# Altium PCB PCB_RGB2HDMI_2022-10-02_beta3.pcbdoc (part 3 of 4)
Units mil, origin at the board's own origin, x right, y up, seen from the top; angles counter-clockwise.
Board outline 5558.95 x 3224.07 mil, 2 copper layers (Top Layer, Bottom Layer); 47 components, 54 nets, 201 pads, 161 vias.
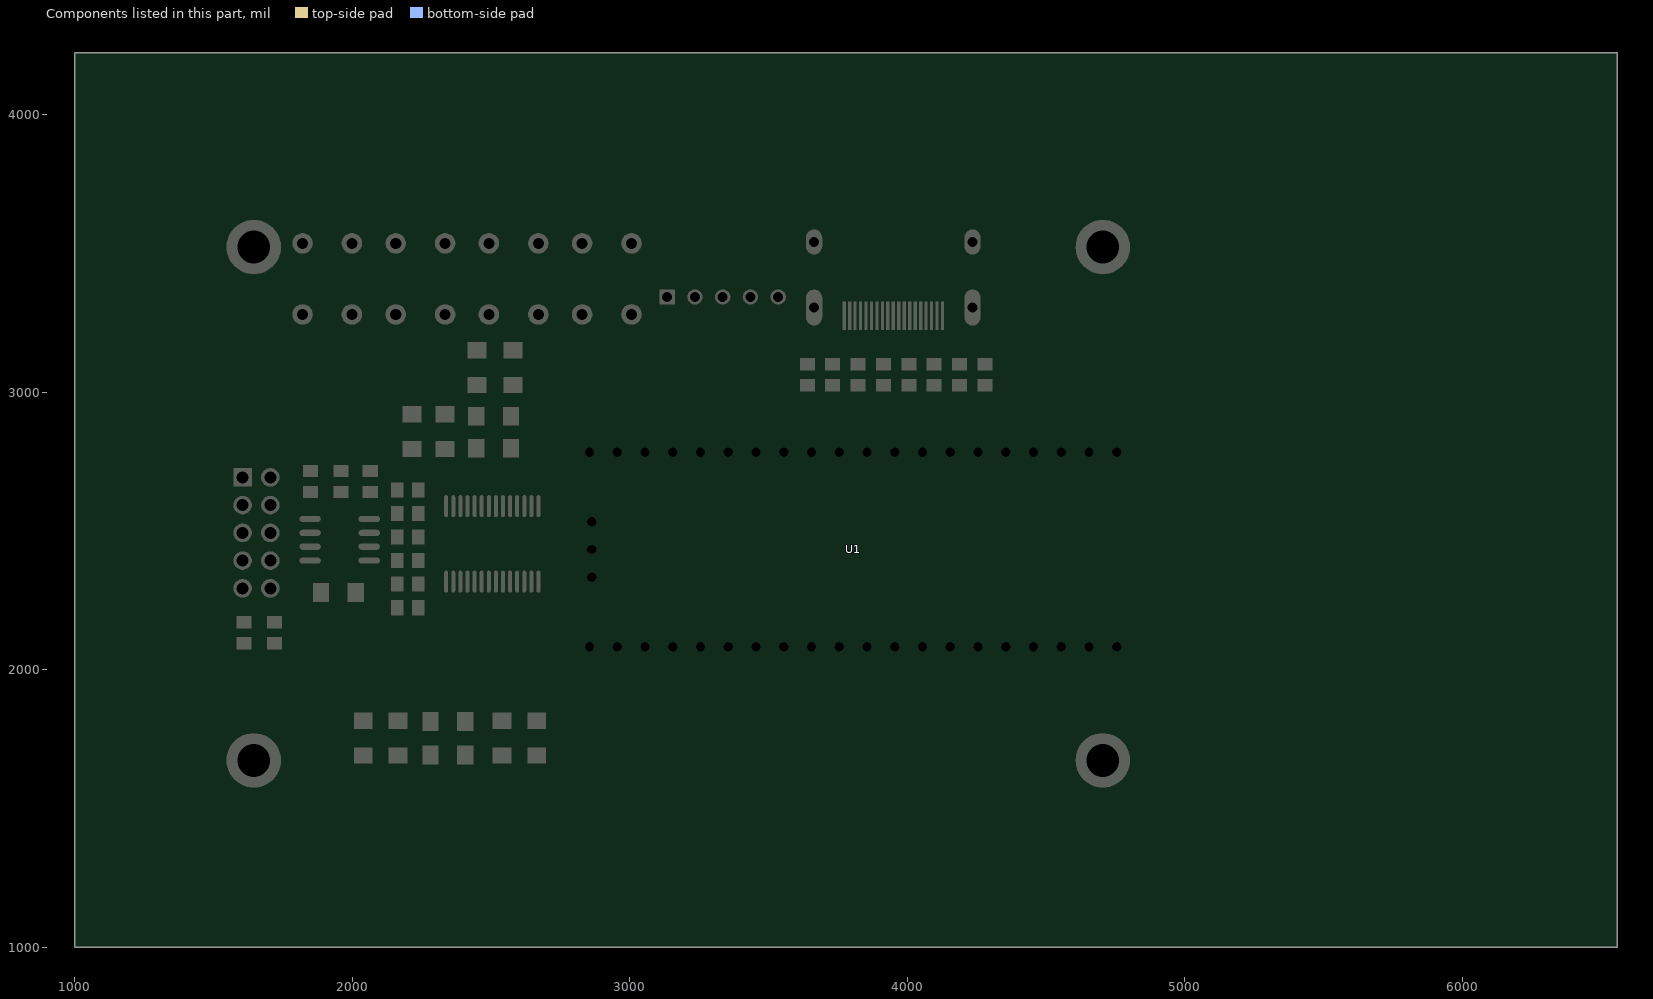
[diagram p3: the components of this part, seen from the top]

## Footprints (in the part's own frame and the unit in brackets; to place one, negate y for a bottom-side part, rotate by r counter-clockwise, add the part's x,y. Pads: shape width x height; smd on the part's side, far side on the other; paste and mask are expansions set on the pad) (continued)
RASPBERRY-PI-PICO [mm] (continued)
  Top Layer region: 11.366,2.032 11.404,2.031 11.442,2.028 11.48,2.023 11.517,2.017 11.555,2.008 11.591,1.998 11.627,1.986 11.662,1.972 11.697,1.957 11.731,1.939 11.764,1.92 11.796,1.9 11.827,1.877 11.856,1.854 11.885,1.829 11.912,1.802 11.938,1.774 11.962,1.745 11.985,1.715 12.007,1.683 12.026,1.651 12.045,1.618 12.061,1.583 12.076,1.548 12.089,1.513 12.1,1.476 12.109,1.44 12.117,1.402 12.123,1.365 12.126,1.327 12.128,1.289 12.128,1.251 12.126,1.213 12.123,1.175 12.117,1.138 12.109,1.1 12.1,1.064 12.089,1.027 12.076,0.992 12.061,0.957 12.045,0.922 12.026,0.889 12.007,0.857 11.985,0.825 11.962,0.795 11.938,0.766 11.912,0.738 11.885,0.711 11.856,0.686 11.827,0.663 11.796,0.64 11.764,0.62 11.731,0.601 11.697,0.583 11.662,0.568 11.627,0.554 11.591,0.542 11.555,0.532 11.517,0.523 11.48,0.517 11.442,0.512 11.404,0.509 11.366,0.508 8.954,0.508 8.916,0.509 8.878,0.512 8.84,0.517 8.803,0.523 8.765,0.532 8.729,0.542 8.693,0.554 8.658,0.568 8.623,0.583 8.589,0.601 8.556,0.62 8.524,0.64 8.493,0.663 8.464,0.686 8.435,0.711 8.408,0.738 8.382,0.766 8.358,0.795 8.335,0.825 8.313,0.857 8.294,0.889 8.275,0.922 8.259,0.957 8.244,0.992 8.231,1.027 8.22,1.064 8.211,1.1 8.203,1.138 8.197,1.175 8.194,1.213 8.192,1.251 8.192,1.289 8.194,1.327 8.197,1.365 8.203,1.402 8.211,1.44 8.22,1.476 8.231,1.513 8.244,1.548 8.259,1.583 8.275,1.618 8.294,1.651 8.313,1.683 8.335,1.715 8.358,1.745 8.382,1.774 8.408,1.802 8.435,1.829 8.464,1.854 8.493,1.877 8.524,1.9 8.556,1.92 8.589,1.939 8.623,1.957 8.658,1.972 8.693,1.986 8.729,1.998 8.765,2.008 8.803,2.017 8.84,2.023 8.878,2.028 8.916,2.031 8.954,2.032
  Top Layer region: 11.366,4.572 11.404,4.571 11.442,4.568 11.48,4.563 11.517,4.557 11.555,4.548 11.591,4.538 11.627,4.526 11.662,4.512 11.697,4.497 11.731,4.479 11.764,4.46 11.796,4.44 11.827,4.417 11.856,4.394 11.885,4.369 11.912,4.342 11.938,4.314 11.962,4.285 11.985,4.255 12.007,4.223 12.026,4.191 12.045,4.158 12.061,4.123 12.076,4.088 12.089,4.053 12.1,4.016 12.109,3.98 12.117,3.942 12.123,3.905 12.126,3.867 12.128,3.829 12.128,3.791 12.126,3.753 12.123,3.715 12.117,3.678 12.109,3.64 12.1,3.604 12.089,3.567 12.076,3.532 12.061,3.497 12.045,3.462 12.026,3.429 12.007,3.397 11.985,3.365 11.962,3.335 11.938,3.306 11.912,3.278 11.885,3.251 11.856,3.226 11.827,3.203 11.796,3.18 11.764,3.16 11.731,3.141 11.697,3.123 11.662,3.108 11.627,3.094 11.591,3.082 11.555,3.072 11.517,3.063 11.48,3.057 11.442,3.052 11.404,3.049 11.366,3.048 8.954,3.048 8.916,3.049 8.878,3.052 8.84,3.057 8.803,3.063 8.765,3.072 8.729,3.082 8.693,3.094 8.658,3.108 8.623,3.123 8.589,3.141 8.556,3.16 8.524,3.18 8.493,3.203 8.464,3.226 8.435,3.251 8.408,3.278 8.382,3.306 8.358,3.335 8.335,3.365 8.313,3.397 8.294,3.429 8.275,3.462 8.259,3.497 8.244,3.532 8.231,3.567 8.22,3.604 8.211,3.64 8.203,3.678 8.197,3.715 8.194,3.753 8.192,3.791 8.192,3.829 8.194,3.867 8.197,3.905 8.203,3.942 8.211,3.98 8.22,4.016 8.231,4.053 8.244,4.088 8.259,4.123 8.275,4.158 8.294,4.191 8.313,4.223 8.335,4.255 8.358,4.285 8.382,4.314 8.408,4.342 8.435,4.369 8.464,4.394 8.493,4.417 8.524,4.44 8.556,4.46 8.589,4.479 8.623,4.497 8.658,4.512 8.693,4.526 8.729,4.538 8.765,4.548 8.803,4.557 8.84,4.563 8.878,4.568 8.916,4.571 8.953,4.572
  Top Layer region: 11.366,9.652 11.404,9.651 11.442,9.648 11.48,9.643 11.517,9.637 11.555,9.628 11.591,9.618 11.627,9.606 11.662,9.592 11.697,9.577 11.731,9.559 11.764,9.54 11.796,9.52 11.827,9.497 11.856,9.474 11.885,9.449 11.912,9.422 11.938,9.394 11.962,9.365 11.985,9.335 12.007,9.303 12.026,9.271 12.045,9.238 12.061,9.203 12.076,9.168 12.089,9.133 12.1,9.096 12.109,9.06 12.117,9.022 12.123,8.985 12.126,8.947 12.128,8.909 12.128,8.871 12.126,8.833 12.123,8.795 12.117,8.758 12.109,8.72 12.1,8.684 12.089,8.647 12.076,8.612 12.061,8.577 12.045,8.542 12.026,8.509 12.007,8.477 11.985,8.445 11.962,8.415 11.938,8.386 11.912,8.358 11.885,8.331 11.856,8.306 11.827,8.283 11.796,8.26 11.764,8.24 11.731,8.221 11.697,8.203 11.662,8.188 11.627,8.174 11.591,8.162 11.555,8.152 11.517,8.143 11.48,8.137 11.442,8.132 11.404,8.129 11.366,8.128 8.953,8.128 8.916,8.129 8.878,8.132 8.84,8.137 8.803,8.143 8.765,8.152 8.729,8.162 8.693,8.174 8.658,8.188 8.623,8.203 8.589,8.221 8.556,8.24 8.524,8.26 8.493,8.283 8.464,8.306 8.435,8.331 8.408,8.358 8.382,8.386 8.358,8.415 8.335,8.445 8.313,8.477 8.294,8.509 8.275,8.542 8.259,8.577 8.244,8.612 8.231,8.647 8.22,8.684 8.211,8.72 8.203,8.758 8.197,8.795 8.194,8.833 8.192,8.871 8.192,8.909 8.194,8.947 8.197,8.985 8.203,9.022 8.211,9.06 8.22,9.096 8.231,9.133 8.244,9.168 8.259,9.203 8.275,9.238 8.294,9.271 8.313,9.303 8.335,9.335 8.358,9.365 8.382,9.394 8.408,9.422 8.435,9.449 8.464,9.474 8.493,9.497 8.524,9.52 8.556,9.54 8.589,9.559 8.623,9.577 8.658,9.592 8.693,9.606 8.729,9.618 8.765,9.628 8.803,9.637 8.84,9.643 8.878,9.648 8.916,9.651 8.953,9.652
  Top Layer region: 11.366,12.192 11.404,12.191 11.442,12.188 11.48,12.183 11.517,12.177 11.555,12.168 11.591,12.158 11.627,12.146 11.662,12.132 11.697,12.117 11.731,12.099 11.764,12.08 11.796,12.06 11.827,12.037 11.856,12.014 11.885,11.989 11.912,11.962 11.938,11.934 11.962,11.905 11.985,11.875 12.007,11.843 12.026,11.811 12.045,11.778 12.061,11.743 12.076,11.708 12.089,11.673 12.1,11.636 12.109,11.6 12.117,11.562 12.123,11.525 12.126,11.487 12.128,11.449 12.128,11.411 12.126,11.373 12.123,11.335 12.117,11.298 12.109,11.26 12.1,11.224 12.089,11.187 12.076,11.152 12.061,11.117 12.045,11.082 12.026,11.049 12.007,11.017 11.985,10.985 11.962,10.955 11.938,10.926 11.912,10.898 11.885,10.871 11.856,10.846 11.827,10.823 11.796,10.8 11.764,10.78 11.731,10.761 11.697,10.743 11.662,10.728 11.627,10.714 11.591,10.702 11.555,10.692 11.517,10.683 11.48,10.677 11.442,10.672 11.404,10.669 11.366,10.668 8.953,10.668 8.916,10.669 8.878,10.672 8.84,10.677 8.803,10.683 8.765,10.692 8.729,10.702 8.693,10.714 8.658,10.728 8.623,10.743 8.589,10.761 8.556,10.78 8.524,10.8 8.493,10.823 8.464,10.846 8.435,10.871 8.408,10.898 8.382,10.926 8.358,10.955 8.335,10.985 8.313,11.017 8.294,11.049 8.275,11.082 8.259,11.117 8.244,11.152 8.231,11.187 8.22,11.224 8.211,11.26 8.203,11.298 8.197,11.335 8.194,11.373 8.192,11.411 8.192,11.449 8.194,11.487 8.197,11.525 8.203,11.562 8.211,11.6 8.22,11.636 8.231,11.673 8.244,11.708 8.259,11.743 8.275,11.778 8.294,11.811 8.313,11.843 8.335,11.875 8.358,11.905 8.382,11.934 8.408,11.962 8.435,11.989 8.464,12.014 8.493,12.037 8.524,12.06 8.556,12.08 8.589,12.099 8.623,12.117 8.658,12.132 8.693,12.146 8.729,12.158 8.765,12.168 8.803,12.177 8.84,12.183 8.878,12.188 8.916,12.191 8.953,12.192
  Top Layer region: 11.366,14.732 11.404,14.731 11.442,14.728 11.48,14.723 11.517,14.717 11.555,14.708 11.591,14.698 11.627,14.686 11.662,14.672 11.697,14.657 11.731,14.639 11.764,14.62 11.796,14.6 11.827,14.577 11.856,14.554 11.885,14.529 11.912,14.502 11.938,14.474 11.962,14.445 11.985,14.415 12.007,14.383 12.026,14.351 12.045,14.318 12.061,14.283 12.076,14.248 12.089,14.213 12.1,14.176 12.109,14.14 12.117,14.102 12.123,14.065 12.126,14.027 12.128,13.989 12.128,13.951 12.126,13.913 12.123,13.875 12.117,13.838 12.109,13.8 12.1,13.764 12.089,13.727 12.076,13.692 12.061,13.657 12.045,13.622 12.026,13.589 12.007,13.557 11.985,13.525 11.962,13.495 11.938,13.466 11.912,13.438 11.885,13.411 11.856,13.386 11.827,13.363 11.796,13.34 11.764,13.32 11.731,13.301 11.697,13.283 11.662,13.268 11.627,13.254 11.591,13.242 11.555,13.232 11.517,13.223 11.48,13.217 11.442,13.212 11.404,13.209 11.366,13.208 8.953,13.208 8.916,13.209 8.878,13.212 8.84,13.217 8.803,13.223 8.765,13.232 8.729,13.242 8.693,13.254 8.658,13.268 8.623,13.283 8.589,13.301 8.556,13.32 8.524,13.34 8.493,13.363 8.464,13.386 8.435,13.411 8.408,13.438 8.382,13.466 8.358,13.495 8.335,13.525 8.313,13.557 8.294,13.589 8.275,13.622 8.259,13.657 8.244,13.692 8.231,13.727 8.22,13.764 8.211,13.8 8.203,13.838 8.197,13.875 8.194,13.913 8.192,13.951 8.192,13.989 8.194,14.027 8.197,14.065 8.203,14.102 8.211,14.14 8.22,14.176 8.231,14.213 8.244,14.248 8.259,14.283 8.275,14.318 8.294,14.351 8.313,14.383 8.335,14.415 8.358,14.445 8.382,14.474 8.408,14.502 8.435,14.529 8.464,14.554 8.493,14.577 8.524,14.6 8.556,14.62 8.589,14.639 8.623,14.657 8.658,14.672 8.693,14.686 8.729,14.698 8.765,14.708 8.803,14.717 8.84,14.723 8.878,14.728 8.916,14.731 8.953,14.732
  Top Layer region: 11.366,17.272 11.404,17.271 11.442,17.268 11.48,17.263 11.517,17.257 11.555,17.248 11.591,17.238 11.627,17.226 11.662,17.212 11.697,17.197 11.731,17.179 11.764,17.16 11.796,17.14 11.827,17.117 11.856,17.094 11.885,17.069 11.912,17.042 11.938,17.014 11.962,16.985 11.985,16.955 12.007,16.923 12.026,16.891 12.045,16.858 12.061,16.823 12.076,16.788 12.089,16.753 12.1,16.716 12.109,16.68 12.117,16.642 12.123,16.605 12.126,16.567 12.128,16.529 12.128,16.491 12.126,16.453 12.123,16.415 12.117,16.378 12.109,16.34 12.1,16.304 12.089,16.267 12.076,16.232 12.061,16.197 12.045,16.162 12.026,16.129 12.007,16.097 11.985,16.065 11.962,16.035 11.938,16.006 11.912,15.978 11.885,15.951 11.856,15.926 11.827,15.903 11.796,15.88 11.764,15.86 11.731,15.841 11.697,15.823 11.662,15.808 11.627,15.794 11.591,15.782 11.555,15.772 11.517,15.763 11.48,15.757 11.442,15.752 11.404,15.749 11.366,15.748 8.953,15.748 8.916,15.749 8.878,15.752 8.84,15.757 8.803,15.763 8.765,15.772 8.729,15.782 8.693,15.794 8.658,15.808 8.623,15.823 8.589,15.841 8.556,15.86 8.524,15.88 8.493,15.903 8.464,15.926 8.435,15.951 8.408,15.978 8.382,16.006 8.358,16.035 8.335,16.065 8.313,16.097 8.294,16.129 8.275,16.162 8.259,16.197 8.244,16.232 8.231,16.267 8.22,16.304 8.211,16.34 8.203,16.378 8.197,16.415 8.194,16.453 8.192,16.491 8.192,16.529 8.194,16.567 8.197,16.605 8.203,16.642 8.211,16.68 8.22,16.716 8.231,16.753 8.244,16.788 8.259,16.823 8.275,16.858 8.294,16.891 8.313,16.923 8.335,16.955 8.358,16.985 8.382,17.014 8.408,17.042 8.435,17.069 8.464,17.094 8.493,17.117 8.524,17.14 8.556,17.16 8.589,17.179 8.623,17.197 8.658,17.212 8.693,17.226 8.729,17.238 8.765,17.248 8.803,17.257 8.84,17.263 8.878,17.268 8.916,17.271 8.953,17.272
  Top Layer region: 11.366,22.352 11.404,22.351 11.442,22.348 11.48,22.343 11.517,22.337 11.555,22.328 11.591,22.318 11.627,22.306 11.662,22.292 11.697,22.277 11.731,22.259 11.764,22.24 11.796,22.22 11.827,22.197 11.856,22.174 11.885,22.149 11.912,22.122 11.938,22.094 11.962,22.065 11.985,22.035 12.007,22.003 12.026,21.971 12.045,21.938 12.061,21.903 12.076,21.868 12.089,21.833 12.1,21.796 12.109,21.76 12.117,21.722 12.123,21.685 12.126,21.647 12.128,21.609 12.128,21.571 12.126,21.533 12.123,21.495 12.117,21.458 12.109,21.42 12.1,21.384 12.089,21.347 12.076,21.312 12.061,21.277 12.045,21.242 12.026,21.209 12.007,21.177 11.985,21.145 11.962,21.115 11.938,21.086 11.912,21.058 11.885,21.031 11.856,21.006 11.827,20.983 11.796,20.96 11.764,20.94 11.731,20.921 11.697,20.903 11.662,20.888 11.627,20.874 11.591,20.862 11.555,20.852 11.517,20.843 11.48,20.837 11.442,20.832 11.404,20.829 11.366,20.828 8.953,20.828 8.916,20.829 8.878,20.832 8.84,20.837 8.803,20.843 8.765,20.852 8.729,20.862 8.693,20.874 8.658,20.888 8.623,20.903 8.589,20.921 8.556,20.94 8.524,20.96 8.493,20.983 8.464,21.006 8.435,21.031 8.408,21.058 8.382,21.086 8.358,21.115 8.335,21.145 8.313,21.177 8.294,21.209 8.275,21.242 8.259,21.277 8.244,21.312 8.231,21.347 8.22,21.384 8.211,21.42 8.203,21.458 8.197,21.495 8.194,21.533 8.192,21.571 8.192,21.609 8.194,21.647 8.197,21.685 8.203,21.722 8.211,21.76 8.22,21.796 8.231,21.833 8.244,21.868 8.259,21.903 8.275,21.938 8.294,21.971 8.313,22.003 8.335,22.035 8.358,22.065 8.382,22.094 8.408,22.122 8.435,22.149 8.464,22.174 8.493,22.197 8.524,22.22 8.556,22.24 8.589,22.259 8.623,22.277 8.658,22.292 8.693,22.306 8.729,22.318 8.765,22.328 8.803,22.337 8.84,22.343 8.878,22.348 8.916,22.351 8.953,22.352
  Top Layer region: 11.366,24.892 11.404,24.891 11.442,24.888 11.48,24.883 11.517,24.877 11.555,24.868 11.591,24.858 11.627,24.846 11.662,24.832 11.697,24.817 11.731,24.799 11.764,24.78 11.796,24.76 11.827,24.737 11.856,24.714 11.885,24.689 11.912,24.662 11.938,24.634 11.962,24.605 11.985,24.575 12.007,24.543 12.026,24.511 12.045,24.478 12.061,24.443 12.076,24.408 12.089,24.373 12.1,24.336 12.109,24.3 12.117,24.262 12.123,24.225 12.126,24.187 12.128,24.149 12.128,24.111 12.126,24.073 12.123,24.035 12.117,23.998 12.109,23.96 12.1,23.924 12.089,23.887 12.076,23.852 12.061,23.817 12.045,23.782 12.026,23.749 12.007,23.717 11.985,23.685 11.962,23.655 11.938,23.626 11.912,23.598 11.885,23.571 11.856,23.546 11.827,23.523 11.796,23.5 11.764,23.48 11.731,23.461 11.697,23.443 11.662,23.428 11.627,23.414 11.591,23.402 11.555,23.392 11.517,23.383 11.48,23.377 11.442,23.372 11.404,23.369 11.366,23.368 8.953,23.368 8.916,23.369 8.878,23.372 8.84,23.377 8.803,23.383 8.765,23.392 8.729,23.402 8.693,23.414 8.658,23.428 8.623,23.443 8.589,23.461 8.556,23.48 8.524,23.5 8.493,23.523 8.464,23.546 8.435,23.571 8.408,23.598 8.382,23.626 8.358,23.655 8.335,23.685 8.313,23.717 8.294,23.749 8.275,23.782 8.259,23.817 8.244,23.852 8.231,23.887 8.22,23.924 8.211,23.96 8.203,23.998 8.197,24.035 8.194,24.073 8.192,24.111 8.192,24.149 8.194,24.187 8.197,24.225 8.203,24.262 8.211,24.3 8.22,24.336 8.231,24.373 8.244,24.408 8.259,24.443 8.275,24.478 8.294,24.511 8.313,24.543 8.335,24.575 8.358,24.605 8.382,24.634 8.408,24.662 8.435,24.689 8.464,24.714 8.493,24.737 8.524,24.76 8.556,24.78 8.589,24.799 8.623,24.817 8.658,24.832 8.693,24.846 8.729,24.858 8.765,24.868 8.803,24.877 8.84,24.883 8.878,24.888 8.916,24.891 8.953,24.892
  Top Layer region: -11.366,-24.892 -11.404,-24.891 -11.442,-24.888 -11.48,-24.883 -11.517,-24.877 -11.555,-24.868 -11.591,-24.858 -11.627,-24.846 -11.662,-24.832 -11.697,-24.817 -11.731,-24.799 -11.764,-24.78 -11.796,-24.76 -11.827,-24.737 -11.856,-24.714 -11.885,-24.689 -11.912,-24.662 -11.938,-24.634 -11.962,-24.605 -11.985,-24.575 -12.007,-24.543 -12.026,-24.511 -12.045,-24.478 -12.061,-24.443 -12.076,-24.408 -12.089,-24.373 -12.1,-24.336 -12.109,-24.3 -12.117,-24.262 -12.123,-24.225 -12.126,-24.187 -12.128,-24.149 -12.128,-24.111 -12.126,-24.073 -12.123,-24.035 -12.117,-23.998 -12.109,-23.96 -12.1,-23.924 -12.089,-23.887 -12.076,-23.852 -12.061,-23.817 -12.045,-23.782 -12.026,-23.749 -12.007,-23.717 -11.985,-23.685 -11.962,-23.655 -11.938,-23.626 -11.912,-23.598 -11.885,-23.571 -11.856,-23.546 -11.827,-23.523 -11.796,-23.5 -11.764,-23.48 -11.731,-23.461 -11.697,-23.443 -11.662,-23.428 -11.627,-23.414 -11.591,-23.402 -11.555,-23.392 -11.517,-23.383 -11.48,-23.377 -11.442,-23.372 -11.404,-23.369 -11.366,-23.368 -8.953,-23.368 -8.916,-23.369 -8.878,-23.372 -8.84,-23.377 -8.803,-23.383 -8.765,-23.392 -8.729,-23.402 -8.693,-23.414 -8.658,-23.428 -8.623,-23.443 -8.589,-23.461 -8.556,-23.48 -8.524,-23.5 -8.493,-23.523 -8.464,-23.546 -8.435,-23.571 -8.408,-23.598 -8.382,-23.626 -8.358,-23.655 -8.335,-23.685 -8.313,-23.717 -8.294,-23.749 -8.275,-23.782 -8.259,-23.817 -8.244,-23.852 -8.231,-23.887 -8.22,-23.924 -8.211,-23.96 -8.203,-23.998 -8.197,-24.035 -8.194,-24.073 -8.192,-24.111 -8.192,-24.149 -8.194,-24.187 -8.197,-24.225 -8.203,-24.262 -8.211,-24.3 -8.22,-24.336 -8.231,-24.373 -8.244,-24.408 -8.259,-24.443 -8.275,-24.478 -8.294,-24.511 -8.313,-24.543 -8.335,-24.575 -8.358,-24.605 -8.382,-24.634 -8.408,-24.662 -8.435,-24.689 -8.464,-24.714 -8.493,-24.737 -8.524,-24.76 -8.556,-24.78 -8.589,-24.799 -8.623,-24.817 -8.658,-24.832 -8.693,-24.846 -8.729,-24.858 -8.765,-24.868 -8.803,-24.877 -8.84,-24.883 -8.878,-24.888 -8.916,-24.891 -8.953,-24.892
  Top Layer region: -12.128,7.112 -8.192,7.112 -8.192,5.588 -12.128,5.588
  Top Layer region: -12.128,-5.588 -8.192,-5.588 -8.192,-7.112 -12.128,-7.112
  Top Layer region: -12.128,-18.288 -8.192,-18.288 -8.192,-19.812 -12.128,-19.812
  Top Layer region: 12.128,-19.812 8.192,-19.812 8.192,-18.288 12.128,-18.288
  Top Layer region: 12.128,-7.112 8.192,-7.112 8.192,-5.588 12.128,-5.588
  Top Layer region: 12.128,5.588 8.192,5.588 8.192,7.112 12.128,7.112
  Top Layer region: 12.128,18.288 8.192,18.288 8.192,19.812 12.128,19.812
  Top Layer region: -0.762,-27.165 -0.762,-23.229 0.762,-23.229 0.762,-27.165
  Bottom Layer region: -11.367,23.368 -11.404,23.369 -11.442,23.372 -11.48,23.377 -11.517,23.383 -11.555,23.392 -11.591,23.402 -11.627,23.414 -11.662,23.428 -11.697,23.443 -11.731,23.461 -11.764,23.48 -11.796,23.5 -11.827,23.523 -11.856,23.546 -11.885,23.571 -11.912,23.598 -11.938,23.626 -11.962,23.655 -11.985,23.685 -12.007,23.717 -12.026,23.749 -12.045,23.782 -12.061,23.817 -12.076,23.852 -12.089,23.887 -12.1,23.924 -12.109,23.96 -12.117,23.998 -12.123,24.035 -12.126,24.073 -12.128,24.111 -12.128,24.149 -12.126,24.187 -12.123,24.225 -12.117,24.262 -12.109,24.3 -12.1,24.336 -12.089,24.373 -12.076,24.408 -12.061,24.443 -12.045,24.478 -12.026,24.511 -12.007,24.543 -11.985,24.575 -11.962,24.605 -11.938,24.634 -11.912,24.662 -11.885,24.689 -11.856,24.714 -11.827,24.737 -11.796,24.76 -11.764,24.78 -11.731,24.799 -11.697,24.817 -11.662,24.832 -11.627,24.846 -11.591,24.858 -11.555,24.868 -11.517,24.877 -11.48,24.883 -11.442,24.888 -11.404,24.891 -11.367,24.892 -8.954,24.892 -8.916,24.891 -8.878,24.888 -8.84,24.883 -8.803,24.877 -8.765,24.868 -8.729,24.858 -8.693,24.846 -8.658,24.832 -8.623,24.817 -8.589,24.799 -8.556,24.78 -8.524,24.76 -8.493,24.737 -8.464,24.714 -8.435,24.689 -8.408,24.662 -8.382,24.634 -8.358,24.605 -8.335,24.575 -8.313,24.543 -8.294,24.511 -8.275,24.478 -8.259,24.443 -8.244,24.408 -8.231,24.373 -8.22,24.336 -8.211,24.3 -8.203,24.262 -8.197,24.225 -8.194,24.187 -8.192,24.149 -8.192,24.111 -8.194,24.073 -8.197,24.035 -8.203,23.998 -8.211,23.96 -8.22,23.924 -8.231,23.887 -8.244,23.852 -8.259,23.817 -8.275,23.782 -8.294,23.749 -8.313,23.717 -8.335,23.685 -8.358,23.655 -8.382,23.626 -8.408,23.598 -8.435,23.571 -8.464,23.546 -8.493,23.523 -8.524,23.5 -8.556,23.48 -8.589,23.461 -8.623,23.443 -8.658,23.428 -8.693,23.414 -8.729,23.402 -8.765,23.392 -8.803,23.383 -8.84,23.377 -8.878,23.372 -8.916,23.369 -8.954,23.368
  Bottom Layer region: -11.367,20.828 -11.404,20.829 -11.442,20.832 -11.48,20.837 -11.517,20.843 -11.555,20.852 -11.591,20.862 -11.627,20.874 -11.662,20.888 -11.697,20.903 -11.731,20.921 -11.764,20.94 -11.796,20.96 -11.827,20.983 -11.856,21.006 -11.885,21.031 -11.912,21.058 -11.938,21.086 -11.962,21.115 -11.985,21.145 -12.007,21.177 -12.026,21.209 -12.045,21.242 -12.061,21.277 -12.076,21.312 -12.089,21.347 -12.1,21.384 -12.109,21.42 -12.117,21.458 -12.123,21.495 -12.126,21.533 -12.128,21.571 -12.128,21.609 -12.126,21.647 -12.123,21.685 -12.117,21.722 -12.109,21.76 -12.1,21.796 -12.089,21.833 -12.076,21.868 -12.061,21.903 -12.045,21.938 -12.026,21.971 -12.007,22.003 -11.985,22.035 -11.962,22.065 -11.938,22.094 -11.912,22.122 -11.885,22.149 -11.856,22.174 -11.827,22.197 -11.796,22.22 -11.764,22.24 -11.731,22.259 -11.697,22.277 -11.662,22.292 -11.627,22.306 -11.591,22.318 -11.555,22.328 -11.517,22.337 -11.48,22.343 -11.442,22.348 -11.404,22.351 -11.367,22.352 -8.954,22.352 -8.916,22.351 -8.878,22.348 -8.84,22.343 -8.803,22.337 -8.765,22.328 -8.729,22.318 -8.693,22.306 -8.658,22.292 -8.623,22.277 -8.589,22.259 -8.556,22.24 -8.524,22.22 -8.493,22.197 -8.464,22.174 -8.435,22.149 -8.408,22.122 -8.382,22.094 -8.358,22.065 -8.335,22.035 -8.313,22.003 -8.294,21.971 -8.275,21.938 -8.259,21.903 -8.244,21.868 -8.231,21.833 -8.22,21.796 -8.211,21.76 -8.203,21.722 -8.197,21.685 -8.194,21.647 -8.192,21.609 -8.192,21.571 -8.194,21.533 -8.197,21.495 -8.203,21.458 -8.211,21.42 -8.22,21.384 -8.231,21.347 -8.244,21.312 -8.259,21.277 -8.275,21.242 -8.294,21.209 -8.313,21.177 -8.335,21.145 -8.358,21.115 -8.382,21.086 -8.408,21.058 -8.435,21.031 -8.464,21.006 -8.493,20.983 -8.524,20.96 -8.556,20.94 -8.589,20.921 -8.623,20.903 -8.658,20.888 -8.693,20.874 -8.729,20.862 -8.765,20.852 -8.803,20.843 -8.84,20.837 -8.878,20.832 -8.916,20.829 -8.954,20.828
  Bottom Layer region: -12.128,19.812 -8.192,19.812 -8.192,18.288 -12.128,18.288
  Bottom Layer region: -11.367,15.748 -11.404,15.749 -11.442,15.752 -11.48,15.757 -11.517,15.763 -11.555,15.772 -11.591,15.782 -11.627,15.794 -11.662,15.808 -11.697,15.823 -11.731,15.841 -11.764,15.86 -11.796,15.88 -11.827,15.903 -11.856,15.926 -11.885,15.951 -11.912,15.978 -11.938,16.006 -11.962,16.035 -11.985,16.065 -12.007,16.097 -12.026,16.129 -12.045,16.162 -12.061,16.197 -12.076,16.232 -12.089,16.267 -12.1,16.304 -12.109,16.34 -12.117,16.378 -12.123,16.415 -12.126,16.453 -12.128,16.491 -12.128,16.529 -12.126,16.567 -12.123,16.605 -12.117,16.642 -12.109,16.68 -12.1,16.716 -12.089,16.753 -12.076,16.788 -12.061,16.823 -12.045,16.858 -12.026,16.891 -12.007,16.923 -11.985,16.955 -11.962,16.985 -11.938,17.014 -11.912,17.042 -11.885,17.069 -11.856,17.094 -11.827,17.117 -11.796,17.14 -11.764,17.16 -11.731,17.179 -11.697,17.197 -11.662,17.212 -11.627,17.226 -11.591,17.238 -11.555,17.248 -11.517,17.257 -11.48,17.263 -11.442,17.268 -11.404,17.271 -11.367,17.272 -8.954,17.272 -8.916,17.271 -8.878,17.268 -8.84,17.263 -8.803,17.257 -8.765,17.248 -8.729,17.238 -8.693,17.226 -8.658,17.212 -8.623,17.197 -8.589,17.179 -8.556,17.16 -8.524,17.14 -8.493,17.117 -8.464,17.094 -8.435,17.069 -8.408,17.042 -8.382,17.014 -8.358,16.985 -8.335,16.955 -8.313,16.923 -8.294,16.891 -8.275,16.858 -8.259,16.823 -8.244,16.788 -8.231,16.753 -8.22,16.716 -8.211,16.68 -8.203,16.642 -8.197,16.605 -8.194,16.567 -8.192,16.529 -8.192,16.491 -8.194,16.453 -8.197,16.415 -8.203,16.378 -8.211,16.34 -8.22,16.304 -8.231,16.267 -8.244,16.232 -8.259,16.197 -8.275,16.162 -8.294,16.129 -8.313,16.097 -8.335,16.065 -8.358,16.035 -8.382,16.006 -8.408,15.978 -8.435,15.951 -8.464,15.926 -8.493,15.903 -8.524,15.88 -8.556,15.86 -8.589,15.841 -8.623,15.823 -8.658,15.808 -8.693,15.794 -8.729,15.782 -8.765,15.772 -8.803,15.763 -8.84,15.757 -8.878,15.752 -8.916,15.749 -8.954,15.748
  Bottom Layer region: -11.367,13.208 -11.404,13.209 -11.442,13.212 -11.48,13.217 -11.517,13.223 -11.555,13.232 -11.591,13.242 -11.627,13.254 -11.662,13.268 -11.697,13.283 -11.731,13.301 -11.764,13.32 -11.796,13.34 -11.827,13.363 -11.856,13.386 -11.885,13.411 -11.912,13.438 -11.938,13.466 -11.962,13.495 -11.985,13.525 -12.007,13.557 -12.026,13.589 -12.045,13.622 -12.061,13.657 -12.076,13.692 -12.089,13.727 -12.1,13.764 -12.109,13.8 -12.117,13.838 -12.123,13.875 -12.126,13.913 -12.128,13.951 -12.128,13.989 -12.126,14.027 -12.123,14.065 -12.117,14.102 -12.109,14.14 -12.1,14.176 -12.089,14.213 -12.076,14.248 -12.061,14.283 -12.045,14.318 -12.026,14.351 -12.007,14.383 -11.985,14.415 -11.962,14.445 -11.938,14.474 -11.912,14.502 -11.885,14.529 -11.856,14.554 -11.827,14.577 -11.796,14.6 -11.764,14.62 -11.731,14.639 -11.697,14.657 -11.662,14.672 -11.627,14.686 -11.591,14.698 -11.555,14.708 -11.517,14.717 -11.48,14.723 -11.442,14.728 -11.404,14.731 -11.367,14.732 -8.954,14.732 -8.916,14.731 -8.878,14.728 -8.84,14.723 -8.803,14.717 -8.765,14.708 -8.729,14.698 -8.693,14.686 -8.658,14.672 -8.623,14.657 -8.589,14.639 -8.556,14.62 -8.524,14.6 -8.493,14.577 -8.464,14.554 -8.435,14.529 -8.408,14.502 -8.382,14.474 -8.358,14.445 -8.335,14.415 -8.313,14.383 -8.294,14.351 -8.275,14.318 -8.259,14.283 -8.244,14.248 -8.231,14.213 -8.22,14.176 -8.211,14.14 -8.203,14.102 -8.197,14.065 -8.194,14.027 -8.192,13.989 -8.192,13.951 -8.194,13.913 -8.197,13.875 -8.203,13.838 -8.211,13.8 -8.22,13.764 -8.231,13.727 -8.244,13.692 -8.259,13.657 -8.275,13.622 -8.294,13.589 -8.313,13.557 -8.335,13.525 -8.358,13.495 -8.382,13.466 -8.408,13.438 -8.435,13.411 -8.464,13.386 -8.493,13.363 -8.524,13.34 -8.556,13.32 -8.589,13.301 -8.623,13.283 -8.658,13.268 -8.693,13.254 -8.729,13.242 -8.765,13.232 -8.803,13.223 -8.84,13.217 -8.878,13.212 -8.916,13.209 -8.954,13.208
  Bottom Layer region: -11.367,10.668 -11.404,10.669 -11.442,10.672 -11.48,10.677 -11.517,10.683 -11.555,10.692 -11.591,10.702 -11.627,10.714 -11.662,10.728 -11.697,10.743 -11.731,10.761 -11.764,10.78 -11.796,10.8 -11.827,10.823 -11.856,10.846 -11.885,10.871 -11.912,10.898 -11.938,10.926 -11.962,10.955 -11.985,10.985 -12.007,11.017 -12.026,11.049 -12.045,11.082 -12.061,11.117 -12.076,11.152 -12.089,11.187 -12.1,11.224 -12.109,11.26 -12.117,11.298 -12.123,11.335 -12.126,11.373 -12.128,11.411 -12.128,11.449 -12.126,11.487 -12.123,11.525 -12.117,11.562 -12.109,11.6 -12.1,11.636 -12.089,11.673 -12.076,11.708 -12.061,11.743 -12.045,11.778 -12.026,11.811 -12.007,11.843 -11.985,11.875 -11.962,11.905 -11.938,11.934 -11.912,11.962 -11.885,11.989 -11.856,12.014 -11.827,12.037 -11.796,12.06 -11.764,12.08 -11.731,12.099 -11.697,12.117 -11.662,12.132 -11.627,12.146 -11.591,12.158 -11.555,12.168 -11.517,12.177 -11.48,12.183 -11.442,12.188 -11.404,12.191 -11.367,12.192 -8.954,12.192 -8.916,12.191 -8.878,12.188 -8.84,12.183 -8.803,12.177 -8.765,12.168 -8.729,12.158 -8.693,12.146 -8.658,12.132 -8.623,12.117 -8.589,12.099 -8.556,12.08 -8.524,12.06 -8.493,12.037 -8.464,12.014 -8.435,11.989 -8.408,11.962 -8.382,11.934 -8.358,11.905 -8.335,11.875 -8.313,11.843 -8.294,11.811 -8.275,11.778 -8.259,11.743 -8.244,11.708 -8.231,11.673 -8.22,11.636 -8.211,11.6 -8.203,11.562 -8.197,11.525 -8.194,11.487 -8.192,11.449 -8.192,11.411 -8.194,11.373 -8.197,11.335 -8.203,11.298 -8.211,11.26 -8.22,11.224 -8.231,11.187 -8.244,11.152 -8.259,11.117 -8.275,11.082 -8.294,11.049 -8.313,11.017 -8.335,10.985 -8.358,10.955 -8.382,10.926 -8.408,10.898 -8.435,10.871 -8.464,10.846 -8.493,10.823 -8.524,10.8 -8.556,10.78 -8.589,10.761 -8.623,10.743 -8.658,10.728 -8.693,10.714 -8.729,10.702 -8.765,10.692 -8.803,10.683 -8.84,10.677 -8.878,10.672 -8.916,10.669 -8.954,10.668
  Bottom Layer region: -11.367,8.128 -11.404,8.129 -11.442,8.132 -11.48,8.137 -11.517,8.143 -11.555,8.152 -11.591,8.162 -11.627,8.174 -11.662,8.188 -11.697,8.203 -11.731,8.221 -11.764,8.24 -11.796,8.26 -11.827,8.283 -11.856,8.306 -11.885,8.331 -11.912,8.358 -11.938,8.386 -11.962,8.415 -11.985,8.445 -12.007,8.477 -12.026,8.509 -12.045,8.542 -12.061,8.577 -12.076,8.612 -12.089,8.647 -12.1,8.684 -12.109,8.72 -12.117,8.758 -12.123,8.795 -12.126,8.833 -12.128,8.871 -12.128,8.909 -12.126,8.947 -12.123,8.985 -12.117,9.022 -12.109,9.06 -12.1,9.096 -12.089,9.133 -12.076,9.168 -12.061,9.203 -12.045,9.238 -12.026,9.271 -12.007,9.303 -11.985,9.335 -11.962,9.365 -11.938,9.394 -11.912,9.422 -11.885,9.449 -11.856,9.474 -11.827,9.497 -11.796,9.52 -11.764,9.54 -11.731,9.559 -11.697,9.577 -11.662,9.592 -11.627,9.606 -11.591,9.618 -11.555,9.628 -11.517,9.637 -11.48,9.643 -11.442,9.648 -11.404,9.651 -11.367,9.652 -8.954,9.652 -8.916,9.651 -8.878,9.648 -8.84,9.643 -8.803,9.637 -8.765,9.628 -8.729,9.618 -8.693,9.606 -8.658,9.592 -8.623,9.577 -8.589,9.559 -8.556,9.54 -8.524,9.52 -8.493,9.497 -8.464,9.474 -8.435,9.449 -8.408,9.422 -8.382,9.394 -8.358,9.365 -8.335,9.335 -8.313,9.303 -8.294,9.271 -8.275,9.238 -8.259,9.203 -8.244,9.168 -8.231,9.133 -8.22,9.096 -8.211,9.06 -8.203,9.022 -8.197,8.985 -8.194,8.947 -8.192,8.909 -8.192,8.871 -8.194,8.833 -8.197,8.795 -8.203,8.758 -8.211,8.72 -8.22,8.684 -8.231,8.647 -8.244,8.612 -8.259,8.577 -8.275,8.542 -8.294,8.509 -8.313,8.477 -8.335,8.445 -8.358,8.415 -8.382,8.386 -8.408,8.358 -8.435,8.331 -8.464,8.306 -8.493,8.283 -8.524,8.26 -8.556,8.24 -8.589,8.221 -8.623,8.203 -8.658,8.188 -8.693,8.174 -8.729,8.162 -8.765,8.152 -8.803,8.143 -8.84,8.137 -8.878,8.132 -8.916,8.129 -8.954,8.128
  Bottom Layer region: -11.367,3.048 -11.404,3.049 -11.442,3.052 -11.48,3.057 -11.517,3.063 -11.555,3.072 -11.591,3.082 -11.627,3.094 -11.662,3.108 -11.697,3.123 -11.731,3.141 -11.764,3.16 -11.796,3.18 -11.827,3.203 -11.856,3.226 -11.885,3.251 -11.912,3.278 -11.938,3.306 -11.962,3.335 -11.985,3.365 -12.007,3.397 -12.026,3.429 -12.045,3.462 -12.061,3.497 -12.076,3.532 -12.089,3.567 -12.1,3.604 -12.109,3.64 -12.117,3.678 -12.123,3.715 -12.126,3.753 -12.128,3.791 -12.128,3.829 -12.126,3.867 -12.123,3.905 -12.117,3.942 -12.109,3.98 -12.1,4.016 -12.089,4.053 -12.076,4.088 -12.061,4.123 -12.045,4.158 -12.026,4.191 -12.007,4.223 -11.985,4.255 -11.962,4.285 -11.938,4.314 -11.912,4.342 -11.885,4.369 -11.856,4.394 -11.827,4.417 -11.796,4.44 -11.764,4.46 -11.731,4.479 -11.697,4.497 -11.662,4.512 -11.627,4.526 -11.591,4.538 -11.555,4.548 -11.517,4.557 -11.48,4.563 -11.442,4.568 -11.404,4.571 -11.367,4.572 -8.954,4.572 -8.916,4.571 -8.878,4.568 -8.84,4.563 -8.803,4.557 -8.765,4.548 -8.729,4.538 -8.693,4.526 -8.658,4.512 -8.623,4.497 -8.589,4.479 -8.556,4.46 -8.524,4.44 -8.493,4.417 -8.464,4.394 -8.435,4.369 -8.408,4.342 -8.382,4.314 -8.358,4.285 -8.335,4.255 -8.313,4.223 -8.294,4.191 -8.275,4.158 -8.259,4.123 -8.244,4.088 -8.231,4.053 -8.22,4.016 -8.211,3.98 -8.203,3.942 -8.197,3.905 -8.194,3.867 -8.192,3.829 -8.192,3.791 -8.194,3.753 -8.197,3.715 -8.203,3.678 -8.211,3.64 -8.22,3.604 -8.231,3.567 -8.244,3.532 -8.259,3.497 -8.275,3.462 -8.294,3.429 -8.313,3.397 -8.335,3.365 -8.358,3.335 -8.382,3.306 -8.408,3.278 -8.435,3.251 -8.464,3.226 -8.493,3.203 -8.524,3.18 -8.556,3.16 -8.589,3.141 -8.623,3.123 -8.658,3.108 -8.693,3.094 -8.729,3.082 -8.765,3.072 -8.803,3.063 -8.84,3.057 -8.878,3.052 -8.916,3.049 -8.954,3.048
  Bottom Layer region: -11.367,0.508 -11.404,0.509 -11.442,0.512 -11.48,0.517 -11.517,0.523 -11.555,0.532 -11.591,0.542 -11.627,0.554 -11.662,0.568 -11.697,0.583 -11.731,0.601 -11.764,0.62 -11.796,0.64 -11.827,0.663 -11.856,0.686 -11.885,0.711 -11.912,0.738 -11.938,0.766 -11.962,0.795 -11.985,0.825 -12.007,0.857 -12.026,0.889 -12.045,0.922 -12.061,0.957 -12.076,0.992 -12.089,1.027 -12.1,1.064 -12.109,1.1 -12.117,1.138 -12.123,1.175 -12.126,1.213 -12.128,1.251 -12.128,1.289 -12.126,1.327 -12.123,1.365 -12.117,1.402 -12.109,1.44 -12.1,1.476 -12.089,1.513 -12.076,1.548 -12.061,1.583 -12.045,1.618 -12.026,1.651 -12.007,1.683 -11.985,1.715 -11.962,1.745 -11.938,1.774 -11.912,1.802 -11.885,1.829 -11.856,1.854 -11.827,1.877 -11.796,1.9 -11.764,1.92 -11.731,1.939 -11.697,1.957 -11.662,1.972 -11.627,1.986 -11.591,1.998 -11.555,2.008 -11.517,2.017 -11.48,2.023 -11.442,2.028 -11.404,2.031 -11.367,2.032 -8.954,2.032 -8.916,2.031 -8.878,2.028 -8.84,2.023 -8.803,2.017 -8.765,2.008 -8.729,1.998 -8.693,1.986 -8.658,1.972 -8.623,1.957 -8.589,1.939 -8.556,1.92 -8.524,1.9 -8.493,1.877 -8.464,1.854 -8.435,1.829 -8.408,1.802 -8.382,1.774 -8.358,1.745 -8.335,1.715 -8.313,1.683 -8.294,1.651 -8.275,1.618 -8.259,1.583 -8.244,1.548 -8.231,1.513 -8.22,1.476 -8.211,1.44 -8.203,1.402 -8.197,1.365 -8.194,1.327 -8.192,1.289 -8.192,1.251 -8.194,1.213 -8.197,1.175 -8.203,1.138 -8.211,1.1 -8.22,1.064 -8.231,1.027 -8.244,0.992 -8.259,0.957 -8.275,0.922 -8.294,0.889 -8.313,0.857 -8.335,0.825 -8.358,0.795 -8.382,0.766 -8.408,0.738 -8.435,0.711 -8.464,0.686 -8.493,0.663 -8.524,0.64 -8.556,0.62 -8.589,0.601 -8.623,0.583 -8.658,0.568 -8.693,0.554 -8.729,0.542 -8.765,0.532 -8.803,0.523 -8.84,0.517 -8.878,0.512 -8.916,0.509 -8.954,0.508
  Bottom Layer region: -11.367,-2.032 -11.404,-2.031 -11.442,-2.028 -11.48,-2.023 -11.517,-2.017 -11.555,-2.008 -11.591,-1.998 -11.627,-1.986 -11.662,-1.972 -11.697,-1.957 -11.731,-1.939 -11.764,-1.92 -11.796,-1.9 -11.827,-1.877 -11.856,-1.854 -11.885,-1.829 -11.912,-1.802 -11.938,-1.774 -11.962,-1.745 -11.985,-1.715 -12.007,-1.683 -12.026,-1.651 -12.045,-1.618 -12.061,-1.583 -12.076,-1.548 -12.089,-1.513 -12.1,-1.476 -12.109,-1.44 -12.117,-1.402 -12.123,-1.365 -12.126,-1.327 -12.128,-1.289 -12.128,-1.251 -12.126,-1.213 -12.123,-1.175 -12.117,-1.138 -12.109,-1.1 -12.1,-1.064 -12.089,-1.027 -12.076,-0.992 -12.061,-0.957 -12.045,-0.922 -12.026,-0.889 -12.007,-0.857 -11.985,-0.825 -11.962,-0.795 -11.938,-0.766 -11.912,-0.738 -11.885,-0.711 -11.856,-0.686 -11.827,-0.663 -11.796,-0.64 -11.764,-0.62 -11.731,-0.601 -11.697,-0.583 -11.662,-0.568 -11.627,-0.554 -11.591,-0.542 -11.555,-0.532 -11.517,-0.523 -11.48,-0.517 -11.442,-0.512 -11.404,-0.509 -11.367,-0.508 -8.954,-0.508 -8.916,-0.509 -8.878,-0.512 -8.84,-0.517 -8.803,-0.523 -8.765,-0.532 -8.729,-0.542 -8.693,-0.554 -8.658,-0.568 -8.623,-0.583 -8.589,-0.601 -8.556,-0.62 -8.524,-0.64 -8.493,-0.663 -8.464,-0.686 -8.435,-0.711 -8.408,-0.738 -8.382,-0.766 -8.358,-0.795 -8.335,-0.825 -8.313,-0.857 -8.294,-0.889 -8.275,-0.922 -8.259,-0.957 -8.244,-0.992 -8.231,-1.027 -8.22,-1.064 -8.211,-1.1 -8.203,-1.138 -8.197,-1.175 -8.194,-1.213 -8.192,-1.251 -8.192,-1.289 -8.194,-1.327 -8.197,-1.365 -8.203,-1.402 -8.211,-1.44 -8.22,-1.476 -8.231,-1.513 -8.244,-1.548 -8.259,-1.583 -8.275,-1.618 -8.294,-1.651 -8.313,-1.683 -8.335,-1.715 -8.358,-1.745 -8.382,-1.774 -8.408,-1.802 -8.435,-1.829 -8.464,-1.854 -8.493,-1.877 -8.524,-1.9 -8.556,-1.92 -8.589,-1.939 -8.623,-1.957 -8.658,-1.972 -8.693,-1.986 -8.729,-1.998 -8.765,-2.008 -8.803,-2.017 -8.84,-2.023 -8.878,-2.028 -8.916,-2.031 -8.954,-2.032
  Bottom Layer region: -11.366,-4.572 -11.404,-4.571 -11.442,-4.568 -11.48,-4.563 -11.517,-4.557 -11.555,-4.548 -11.591,-4.538 -11.627,-4.526 -11.662,-4.512 -11.697,-4.497 -11.731,-4.479 -11.764,-4.46 -11.796,-4.44 -11.827,-4.417 -11.856,-4.394 -11.885,-4.369 -11.912,-4.342 -11.938,-4.314 -11.962,-4.285 -11.985,-4.255 -12.007,-4.223 -12.026,-4.191 -12.045,-4.158 -12.061,-4.123 -12.076,-4.088 -12.089,-4.053 -12.1,-4.016 -12.109,-3.98 -12.117,-3.942 -12.123,-3.905 -12.126,-3.867 -12.128,-3.829 -12.128,-3.791 -12.126,-3.753 -12.123,-3.715 -12.117,-3.678 -12.109,-3.64 -12.1,-3.604 -12.089,-3.567 -12.076,-3.532 -12.061,-3.497 -12.045,-3.462 -12.026,-3.429 -12.007,-3.397 -11.985,-3.365 -11.962,-3.335 -11.938,-3.306 -11.912,-3.278 -11.885,-3.251 -11.856,-3.226 -11.827,-3.203 -11.796,-3.18 -11.764,-3.16 -11.731,-3.141 -11.697,-3.123 -11.662,-3.108 -11.627,-3.094 -11.591,-3.082 -11.555,-3.072 -11.517,-3.063 -11.48,-3.057 -11.442,-3.052 -11.404,-3.049 -11.367,-3.048 -8.954,-3.048 -8.916,-3.049 -8.878,-3.052 -8.84,-3.057 -8.803,-3.063 -8.765,-3.072 -8.729,-3.082 -8.693,-3.094 -8.658,-3.108 -8.623,-3.123 -8.589,-3.141 -8.556,-3.16 -8.524,-3.18 -8.493,-3.203 -8.464,-3.226 -8.435,-3.251 -8.408,-3.278 -8.382,-3.306 -8.358,-3.335 -8.335,-3.365 -8.313,-3.397 -8.294,-3.429 -8.275,-3.462 -8.259,-3.497 -8.244,-3.532 -8.231,-3.567 -8.22,-3.604 -8.211,-3.64 -8.203,-3.678 -8.197,-3.715 -8.194,-3.753 -8.192,-3.791 -8.192,-3.829 -8.194,-3.867 -8.197,-3.905 -8.203,-3.942 -8.211,-3.98 -8.22,-4.016 -8.231,-4.053 -8.244,-4.088 -8.259,-4.123 -8.275,-4.158 -8.294,-4.191 -8.313,-4.223 -8.335,-4.255 -8.358,-4.285 -8.382,-4.314 -8.408,-4.342 -8.435,-4.369 -8.464,-4.394 -8.493,-4.417 -8.524,-4.44 -8.556,-4.46 -8.589,-4.479 -8.623,-4.497 -8.658,-4.512 -8.693,-4.526 -8.729,-4.538 -8.765,-4.548 -8.803,-4.557 -8.84,-4.563 -8.878,-4.568 -8.916,-4.571 -8.953,-4.572
  Bottom Layer region: -11.366,-9.652 -11.404,-9.651 -11.442,-9.648 -11.48,-9.643 -11.517,-9.637 -11.555,-9.628 -11.591,-9.618 -11.627,-9.606 -11.662,-9.592 -11.697,-9.577 -11.731,-9.559 -11.764,-9.54 -11.796,-9.52 -11.827,-9.497 -11.856,-9.474 -11.885,-9.449 -11.912,-9.422 -11.938,-9.394 -11.962,-9.365 -11.985,-9.335 -12.007,-9.303 -12.026,-9.271 -12.045,-9.238 -12.061,-9.203 -12.076,-9.168 -12.089,-9.133 -12.1,-9.096 -12.109,-9.06 -12.117,-9.022 -12.123,-8.985 -12.126,-8.947 -12.128,-8.909 -12.128,-8.871 -12.126,-8.833 -12.123,-8.795 -12.117,-8.758 -12.109,-8.72 -12.1,-8.684 -12.089,-8.647 -12.076,-8.612 -12.061,-8.577 -12.045,-8.542 -12.026,-8.509 -12.007,-8.477 -11.985,-8.445 -11.962,-8.415 -11.938,-8.386 -11.912,-8.358 -11.885,-8.331 -11.856,-8.306 -11.827,-8.283 -11.796,-8.26 -11.764,-8.24 -11.731,-8.221 -11.697,-8.203 -11.662,-8.188 -11.627,-8.174 -11.591,-8.162 -11.555,-8.152 -11.517,-8.143 -11.48,-8.137 -11.442,-8.132 -11.404,-8.129 -11.366,-8.128 -8.953,-8.128 -8.916,-8.129 -8.878,-8.132 -8.84,-8.137 -8.803,-8.143 -8.765,-8.152 -8.729,-8.162 -8.693,-8.174 -8.658,-8.188 -8.623,-8.203 -8.589,-8.221 -8.556,-8.24 -8.524,-8.26 -8.493,-8.283 -8.464,-8.306 -8.435,-8.331 -8.408,-8.358 -8.382,-8.386 -8.358,-8.415 -8.335,-8.445 -8.313,-8.477 -8.294,-8.509 -8.275,-8.542 -8.259,-8.577 -8.244,-8.612 -8.231,-8.647 -8.22,-8.684 -8.211,-8.72 -8.203,-8.758 -8.197,-8.795 -8.194,-8.833 -8.192,-8.871 -8.192,-8.909 -8.194,-8.947 -8.197,-8.985 -8.203,-9.022 -8.211,-9.06 -8.22,-9.096 -8.231,-9.133 -8.244,-9.168 -8.259,-9.203 -8.275,-9.238 -8.294,-9.271 -8.313,-9.303 -8.335,-9.335 -8.358,-9.365 -8.382,-9.394 -8.408,-9.422 -8.435,-9.449 -8.464,-9.474 -8.493,-9.497 -8.524,-9.52 -8.556,-9.54 -8.589,-9.559 -8.623,-9.577 -8.658,-9.592 -8.693,-9.606 -8.729,-9.618 -8.765,-9.628 -8.803,-9.637 -8.84,-9.643 -8.878,-9.648 -8.916,-9.651 -8.953,-9.652
  Bottom Layer region: -11.366,-12.192 -11.404,-12.191 -11.442,-12.188 -11.48,-12.183 -11.517,-12.177 -11.555,-12.168 -11.591,-12.158 -11.627,-12.146 -11.662,-12.132 -11.697,-12.117 -11.731,-12.099 -11.764,-12.08 -11.796,-12.06 -11.827,-12.037 -11.856,-12.014 -11.885,-11.989 -11.912,-11.962 -11.938,-11.934 -11.962,-11.905 -11.985,-11.875 -12.007,-11.843 -12.026,-11.811 -12.045,-11.778 -12.061,-11.743 -12.076,-11.708 -12.089,-11.673 -12.1,-11.636 -12.109,-11.6 -12.117,-11.562 -12.123,-11.525 -12.126,-11.487 -12.128,-11.449 -12.128,-11.411 -12.126,-11.373 -12.123,-11.335 -12.117,-11.298 -12.109,-11.26 -12.1,-11.224 -12.089,-11.187 -12.076,-11.152 -12.061,-11.117 -12.045,-11.082 -12.026,-11.049 -12.007,-11.017 -11.985,-10.985 -11.962,-10.955 -11.938,-10.926 -11.912,-10.898 -11.885,-10.871 -11.856,-10.846 -11.827,-10.823 -11.796,-10.8 -11.764,-10.78 -11.731,-10.761 -11.697,-10.743 -11.662,-10.728 -11.627,-10.714 -11.591,-10.702 -11.555,-10.692 -11.517,-10.683 -11.48,-10.677 -11.442,-10.672 -11.404,-10.669 -11.366,-10.668 -8.953,-10.668 -8.916,-10.669 -8.878,-10.672 -8.84,-10.677 -8.803,-10.683 -8.765,-10.692 -8.729,-10.702 -8.693,-10.714 -8.658,-10.728 -8.623,-10.743 -8.589,-10.761 -8.556,-10.78 -8.524,-10.8 -8.493,-10.823 -8.464,-10.846 -8.435,-10.871 -8.408,-10.898 -8.382,-10.926 -8.358,-10.955 -8.335,-10.985 -8.313,-11.017 -8.294,-11.049 -8.275,-11.082 -8.259,-11.117 -8.244,-11.152 -8.231,-11.187 -8.22,-11.224 -8.211,-11.26 -8.203,-11.298 -8.197,-11.335 -8.194,-11.373 -8.192,-11.411 -8.192,-11.449 -8.194,-11.487 -8.197,-11.525 -8.203,-11.562 -8.211,-11.6 -8.22,-11.636 -8.231,-11.673 -8.244,-11.708 -8.259,-11.743 -8.275,-11.778 -8.294,-11.811 -8.313,-11.843 -8.335,-11.875 -8.358,-11.905 -8.382,-11.934 -8.408,-11.962 -8.435,-11.989 -8.464,-12.014 -8.493,-12.037 -8.524,-12.06 -8.556,-12.08 -8.589,-12.099 -8.623,-12.117 -8.658,-12.132 -8.693,-12.146 -8.729,-12.158 -8.765,-12.168 -8.803,-12.177 -8.84,-12.183 -8.878,-12.188 -8.916,-12.191 -8.953,-12.192
  Bottom Layer region: -11.366,-14.732 -11.404,-14.731 -11.442,-14.728 -11.48,-14.723 -11.517,-14.717 -11.555,-14.708 -11.591,-14.698 -11.627,-14.686 -11.662,-14.672 -11.697,-14.657 -11.731,-14.639 -11.764,-14.62 -11.796,-14.6 -11.827,-14.577 -11.856,-14.554 -11.885,-14.529 -11.912,-14.502 -11.938,-14.474 -11.962,-14.445 -11.985,-14.415 -12.007,-14.383 -12.026,-14.351 -12.045,-14.318 -12.061,-14.283 -12.076,-14.248 -12.089,-14.213 -12.1,-14.176 -12.109,-14.14 -12.117,-14.102 -12.123,-14.065 -12.126,-14.027 -12.128,-13.989 -12.128,-13.951 -12.126,-13.913 -12.123,-13.875 -12.117,-13.838 -12.109,-13.8 -12.1,-13.764 -12.089,-13.727 -12.076,-13.692 -12.061,-13.657 -12.045,-13.622 -12.026,-13.589 -12.007,-13.557 -11.985,-13.525 -11.962,-13.495 -11.938,-13.466 -11.912,-13.438 -11.885,-13.411 -11.856,-13.386 -11.827,-13.363 -11.796,-13.34 -11.764,-13.32 -11.731,-13.301 -11.697,-13.283 -11.662,-13.268 -11.627,-13.254 -11.591,-13.242 -11.555,-13.232 -11.517,-13.223 -11.48,-13.217 -11.442,-13.212 -11.404,-13.209 -11.366,-13.208 -8.953,-13.208 -8.916,-13.209 -8.878,-13.212 -8.84,-13.217 -8.803,-13.223 -8.765,-13.232 -8.729,-13.242 -8.693,-13.254 -8.658,-13.268 -8.623,-13.283 -8.589,-13.301 -8.556,-13.32 -8.524,-13.34 -8.493,-13.363 -8.464,-13.386 -8.435,-13.411 -8.408,-13.438 -8.382,-13.466 -8.358,-13.495 -8.335,-13.525 -8.313,-13.557 -8.294,-13.589 -8.275,-13.622 -8.259,-13.657 -8.244,-13.692 -8.231,-13.727 -8.22,-13.764 -8.211,-13.8 -8.203,-13.838 -8.197,-13.875 -8.194,-13.913 -8.192,-13.951 -8.192,-13.989 -8.194,-14.027 -8.197,-14.065 -8.203,-14.102 -8.211,-14.14 -8.22,-14.176 -8.231,-14.213 -8.244,-14.248 -8.259,-14.283 -8.275,-14.318 -8.294,-14.351 -8.313,-14.383 -8.335,-14.415 -8.358,-14.445 -8.382,-14.474 -8.408,-14.502 -8.435,-14.529 -8.464,-14.554 -8.493,-14.577 -8.524,-14.6 -8.556,-14.62 -8.589,-14.639 -8.623,-14.657 -8.658,-14.672 -8.693,-14.686 -8.729,-14.698 -8.765,-14.708 -8.803,-14.717 -8.84,-14.723 -8.878,-14.728 -8.916,-14.731 -8.953,-14.732
  Bottom Layer region: -11.366,-17.272 -11.404,-17.271 -11.442,-17.268 -11.48,-17.263 -11.517,-17.257 -11.555,-17.248 -11.591,-17.238 -11.627,-17.226 -11.662,-17.212 -11.697,-17.197 -11.731,-17.179 -11.764,-17.16 -11.796,-17.14 -11.827,-17.117 -11.856,-17.094 -11.885,-17.069 -11.912,-17.042 -11.938,-17.014 -11.962,-16.985 -11.985,-16.955 -12.007,-16.923 -12.026,-16.891 -12.045,-16.858 -12.061,-16.823 -12.076,-16.788 -12.089,-16.753 -12.1,-16.716 -12.109,-16.68 -12.117,-16.642 -12.123,-16.605 -12.126,-16.567 -12.128,-16.529 -12.128,-16.491 -12.126,-16.453 -12.123,-16.415 -12.117,-16.378 -12.109,-16.34 -12.1,-16.304 -12.089,-16.267 -12.076,-16.232 -12.061,-16.197 -12.045,-16.162 -12.026,-16.129 -12.007,-16.097 -11.985,-16.065 -11.962,-16.035 -11.938,-16.006 -11.912,-15.978 -11.885,-15.951 -11.856,-15.926 -11.827,-15.903 -11.796,-15.88 -11.764,-15.86 -11.731,-15.841 -11.697,-15.823 -11.662,-15.808 -11.627,-15.794 -11.591,-15.782 -11.555,-15.772 -11.517,-15.763 -11.48,-15.757 -11.442,-15.752 -11.404,-15.749 -11.366,-15.748 -8.953,-15.748 -8.916,-15.749 -8.878,-15.752 -8.84,-15.757 -8.803,-15.763 -8.765,-15.772 -8.729,-15.782 -8.693,-15.794 -8.658,-15.808 -8.623,-15.823 -8.589,-15.841 -8.556,-15.86 -8.524,-15.88 -8.493,-15.903 -8.464,-15.926 -8.435,-15.951 -8.408,-15.978 -8.382,-16.006 -8.358,-16.035 -8.335,-16.065 -8.313,-16.097 -8.294,-16.129 -8.275,-16.162 -8.259,-16.197 -8.244,-16.232 -8.231,-16.267 -8.22,-16.304 -8.211,-16.34 -8.203,-16.378 -8.197,-16.415 -8.194,-16.453 -8.192,-16.491 -8.192,-16.529 -8.194,-16.567 -8.197,-16.605 -8.203,-16.642 -8.211,-16.68 -8.22,-16.716 -8.231,-16.753 -8.244,-16.788 -8.259,-16.823 -8.275,-16.858 -8.294,-16.891 -8.313,-16.923 -8.335,-16.955 -8.358,-16.985 -8.382,-17.014 -8.408,-17.042 -8.435,-17.069 -8.464,-17.094 -8.493,-17.117 -8.524,-17.14 -8.556,-17.16 -8.589,-17.179 -8.623,-17.197 -8.658,-17.212 -8.693,-17.226 -8.729,-17.238 -8.765,-17.248 -8.803,-17.257 -8.84,-17.263 -8.878,-17.268 -8.916,-17.271 -8.953,-17.272
  Bottom Layer region: -11.366,-22.352 -11.404,-22.351 -11.442,-22.348 -11.48,-22.343 -11.517,-22.337 -11.555,-22.328 -11.591,-22.318 -11.627,-22.306 -11.662,-22.292 -11.697,-22.277 -11.731,-22.259 -11.764,-22.24 -11.796,-22.22 -11.827,-22.197 -11.856,-22.174 -11.885,-22.149 -11.912,-22.122 -11.938,-22.094 -11.962,-22.065 -11.985,-22.035 -12.007,-22.003 -12.026,-21.971 -12.045,-21.938 -12.061,-21.903 -12.076,-21.868 -12.089,-21.833 -12.1,-21.796 -12.109,-21.76 -12.117,-21.722 -12.123,-21.685 -12.126,-21.647 -12.128,-21.609 -12.128,-21.571 -12.126,-21.533 -12.123,-21.495 -12.117,-21.458 -12.109,-21.42 -12.1,-21.384 -12.089,-21.347 -12.076,-21.312 -12.061,-21.277 -12.045,-21.242 -12.026,-21.209 -12.007,-21.177 -11.985,-21.145 -11.962,-21.115 -11.938,-21.086 -11.912,-21.058 -11.885,-21.031 -11.856,-21.006 -11.827,-20.983 -11.796,-20.96 -11.764,-20.94 -11.731,-20.921 -11.697,-20.903 -11.662,-20.888 -11.627,-20.874 -11.591,-20.862 -11.555,-20.852 -11.517,-20.843 -11.48,-20.837 -11.442,-20.832 -11.404,-20.829 -11.366,-20.828 -8.953,-20.828 -8.916,-20.829 -8.878,-20.832 -8.84,-20.837 -8.803,-20.843 -8.765,-20.852 -8.729,-20.862 -8.693,-20.874 -8.658,-20.888 -8.623,-20.903 -8.589,-20.921 -8.556,-20.94 -8.524,-20.96 -8.493,-20.983 -8.464,-21.006 -8.435,-21.031 -8.408,-21.058 -8.382,-21.086 -8.358,-21.115 -8.335,-21.145 -8.313,-21.177 -8.294,-21.209 -8.275,-21.242 -8.259,-21.277 -8.244,-21.312 -8.231,-21.347 -8.22,-21.384 -8.211,-21.42 -8.203,-21.458 -8.197,-21.495 -8.194,-21.533 -8.192,-21.571 -8.192,-21.609 -8.194,-21.647 -8.197,-21.685 -8.203,-21.722 -8.211,-21.76 -8.22,-21.796 -8.231,-21.833 -8.244,-21.868 -8.259,-21.903 -8.275,-21.938 -8.294,-21.971 -8.313,-22.003 -8.335,-22.035 -8.358,-22.065 -8.382,-22.094 -8.408,-22.122 -8.435,-22.149 -8.464,-22.174 -8.493,-22.197 -8.524,-22.22 -8.556,-22.24 -8.589,-22.259 -8.623,-22.277 -8.658,-22.292 -8.693,-22.306 -8.729,-22.318 -8.765,-22.328 -8.803,-22.337 -8.84,-22.343 -8.878,-22.348 -8.916,-22.351 -8.953,-22.352
  Bottom Layer region: -1.778,-26.403 -1.779,-26.441 -1.782,-26.479 -1.787,-26.517 -1.793,-26.554 -1.802,-26.591 -1.812,-26.628 -1.824,-26.664 -1.838,-26.699 -1.853,-26.734 -1.871,-26.768 -1.89,-26.801 -1.91,-26.833 -1.933,-26.863 -1.956,-26.893 -1.981,-26.922 -2.008,-26.949 -2.036,-26.975 -2.065,-26.999 -2.095,-27.022 -2.127,-27.043 -2.159,-27.063 -2.192,-27.081 -2.227,-27.098 -2.262,-27.113 -2.297,-27.126 -2.334,-27.137 -2.37,-27.146 -2.408,-27.154 -2.445,-27.159 -2.483,-27.163 -2.521,-27.165 -2.559,-27.165 -2.597,-27.163 -2.635,-27.159 -2.672,-27.154 -2.71,-27.146 -2.746,-27.137 -2.783,-27.126 -2.818,-27.113 -2.853,-27.098 -2.888,-27.081 -2.921,-27.063 -2.953,-27.043 -2.985,-27.022 -3.015,-26.999 -3.044,-26.975 -3.072,-26.949 -3.099,-26.922 -3.124,-26.893 -3.147,-26.863 -3.17,-26.833 -3.19,-26.801 -3.209,-26.768 -3.227,-26.734 -3.242,-26.699 -3.256,-26.664 -3.268,-26.628 -3.278,-26.591 -3.287,-26.554 -3.293,-26.517 -3.298,-26.479 -3.301,-26.441 -3.302,-26.403 -3.302,-23.99 -3.301,-23.952 -3.298,-23.914 -3.293,-23.877 -3.287,-23.839 -3.278,-23.802 -3.268,-23.766 -3.256,-23.73 -3.242,-23.694 -3.227,-23.66 -3.209,-23.626 -3.19,-23.593 -3.17,-23.561 -3.147,-23.53 -3.124,-23.5 -3.099,-23.472 -3.072,-23.445 -3.044,-23.419 -3.015,-23.395 -2.985,-23.372 -2.953,-23.35 -2.921,-23.33 -2.888,-23.312 -2.853,-23.296 -2.818,-23.281 -2.783,-23.268 -2.746,-23.257 -2.71,-23.247 -2.672,-23.24 -2.635,-23.234 -2.597,-23.23 -2.559,-23.229 -2.521,-23.229 -2.483,-23.23 -2.445,-23.234 -2.408,-23.24 -2.37,-23.247 -2.334,-23.257 -2.297,-23.268 -2.262,-23.281 -2.227,-23.296 -2.192,-23.312 -2.159,-23.33 -2.127,-23.35 -2.095,-23.372 -2.065,-23.395 -2.036,-23.419 -2.008,-23.445 -1.981,-23.472 -1.956,-23.5 -1.933,-23.53 -1.91,-23.561 -1.89,-23.593 -1.871,-23.626 -1.853,-23.66 -1.838,-23.694 -1.824,-23.73 -1.812,-23.766 -1.802,-23.802 -1.793,-23.839 -1.787,-23.877 -1.782,-23.914 -1.779,-23.952 -1.778,-23.99
  Bottom Layer region: 3.302,-26.403 3.301,-26.441 3.298,-26.479 3.293,-26.517 3.287,-26.554 3.278,-26.591 3.268,-26.628 3.256,-26.664 3.242,-26.699 3.227,-26.734 3.209,-26.768 3.19,-26.801 3.17,-26.833 3.147,-26.863 3.124,-26.893 3.099,-26.922 3.072,-26.949 3.044,-26.975 3.015,-26.999 2.985,-27.022 2.953,-27.043 2.921,-27.063 2.888,-27.081 2.853,-27.098 2.818,-27.113 2.783,-27.126 2.746,-27.137 2.71,-27.146 2.672,-27.154 2.635,-27.159 2.597,-27.163 2.559,-27.165 2.521,-27.165 2.483,-27.163 2.445,-27.159 2.408,-27.154 2.37,-27.146 2.334,-27.137 2.297,-27.126 2.262,-27.113 2.227,-27.098 2.192,-27.081 2.159,-27.063 2.127,-27.043 2.095,-27.022 2.065,-26.999 2.036,-26.975 2.008,-26.949 1.981,-26.922 1.956,-26.893 1.933,-26.863 1.91,-26.833 1.89,-26.801 1.871,-26.768 1.853,-26.734 1.838,-26.699 1.824,-26.664 1.812,-26.628 1.802,-26.591 1.793,-26.554 1.787,-26.517 1.782,-26.479 1.779,-26.441 1.778,-26.403 1.778,-23.99 1.779,-23.952 1.782,-23.914 1.787,-23.877 1.793,-23.839 1.802,-23.802 1.812,-23.766 1.824,-23.73 1.838,-23.694 1.853,-23.66 1.871,-23.626 1.89,-23.593 1.91,-23.561 1.933,-23.53 1.956,-23.5 1.981,-23.472 2.008,-23.445 2.036,-23.419 2.065,-23.395 2.095,-23.372 2.127,-23.35 2.159,-23.33 2.192,-23.312 2.227,-23.296 2.262,-23.281 2.297,-23.268 2.334,-23.257 2.37,-23.247 2.408,-23.24 2.445,-23.234 2.483,-23.23 2.521,-23.229 2.559,-23.229 2.597,-23.23 2.635,-23.234 2.672,-23.24 2.71,-23.247 2.746,-23.257 2.783,-23.268 2.818,-23.281 2.853,-23.296 2.888,-23.312 2.921,-23.33 2.953,-23.35 2.985,-23.372 3.015,-23.395 3.044,-23.419 3.072,-23.445 3.099,-23.472 3.124,-23.5 3.147,-23.53 3.17,-23.561 3.19,-23.593 3.209,-23.626 3.227,-23.66 3.242,-23.694 3.256,-23.73 3.268,-23.766 3.278,-23.802 3.287,-23.839 3.293,-23.877 3.298,-23.914 3.301,-23.952 3.302,-23.99